# Altium PCB Ups_Design2.PcbDoc (part 1 of 2)
Units mm, origin at the board's own origin, x right, y up, seen from the top; angles counter-clockwise.
Board outline 72 x 110 mm, 2 copper layers (Top Layer, Bottom Layer); 102 components, 59 nets, 324 pads, 32 vias.
Unrouted connection lines stored in the file: 207.
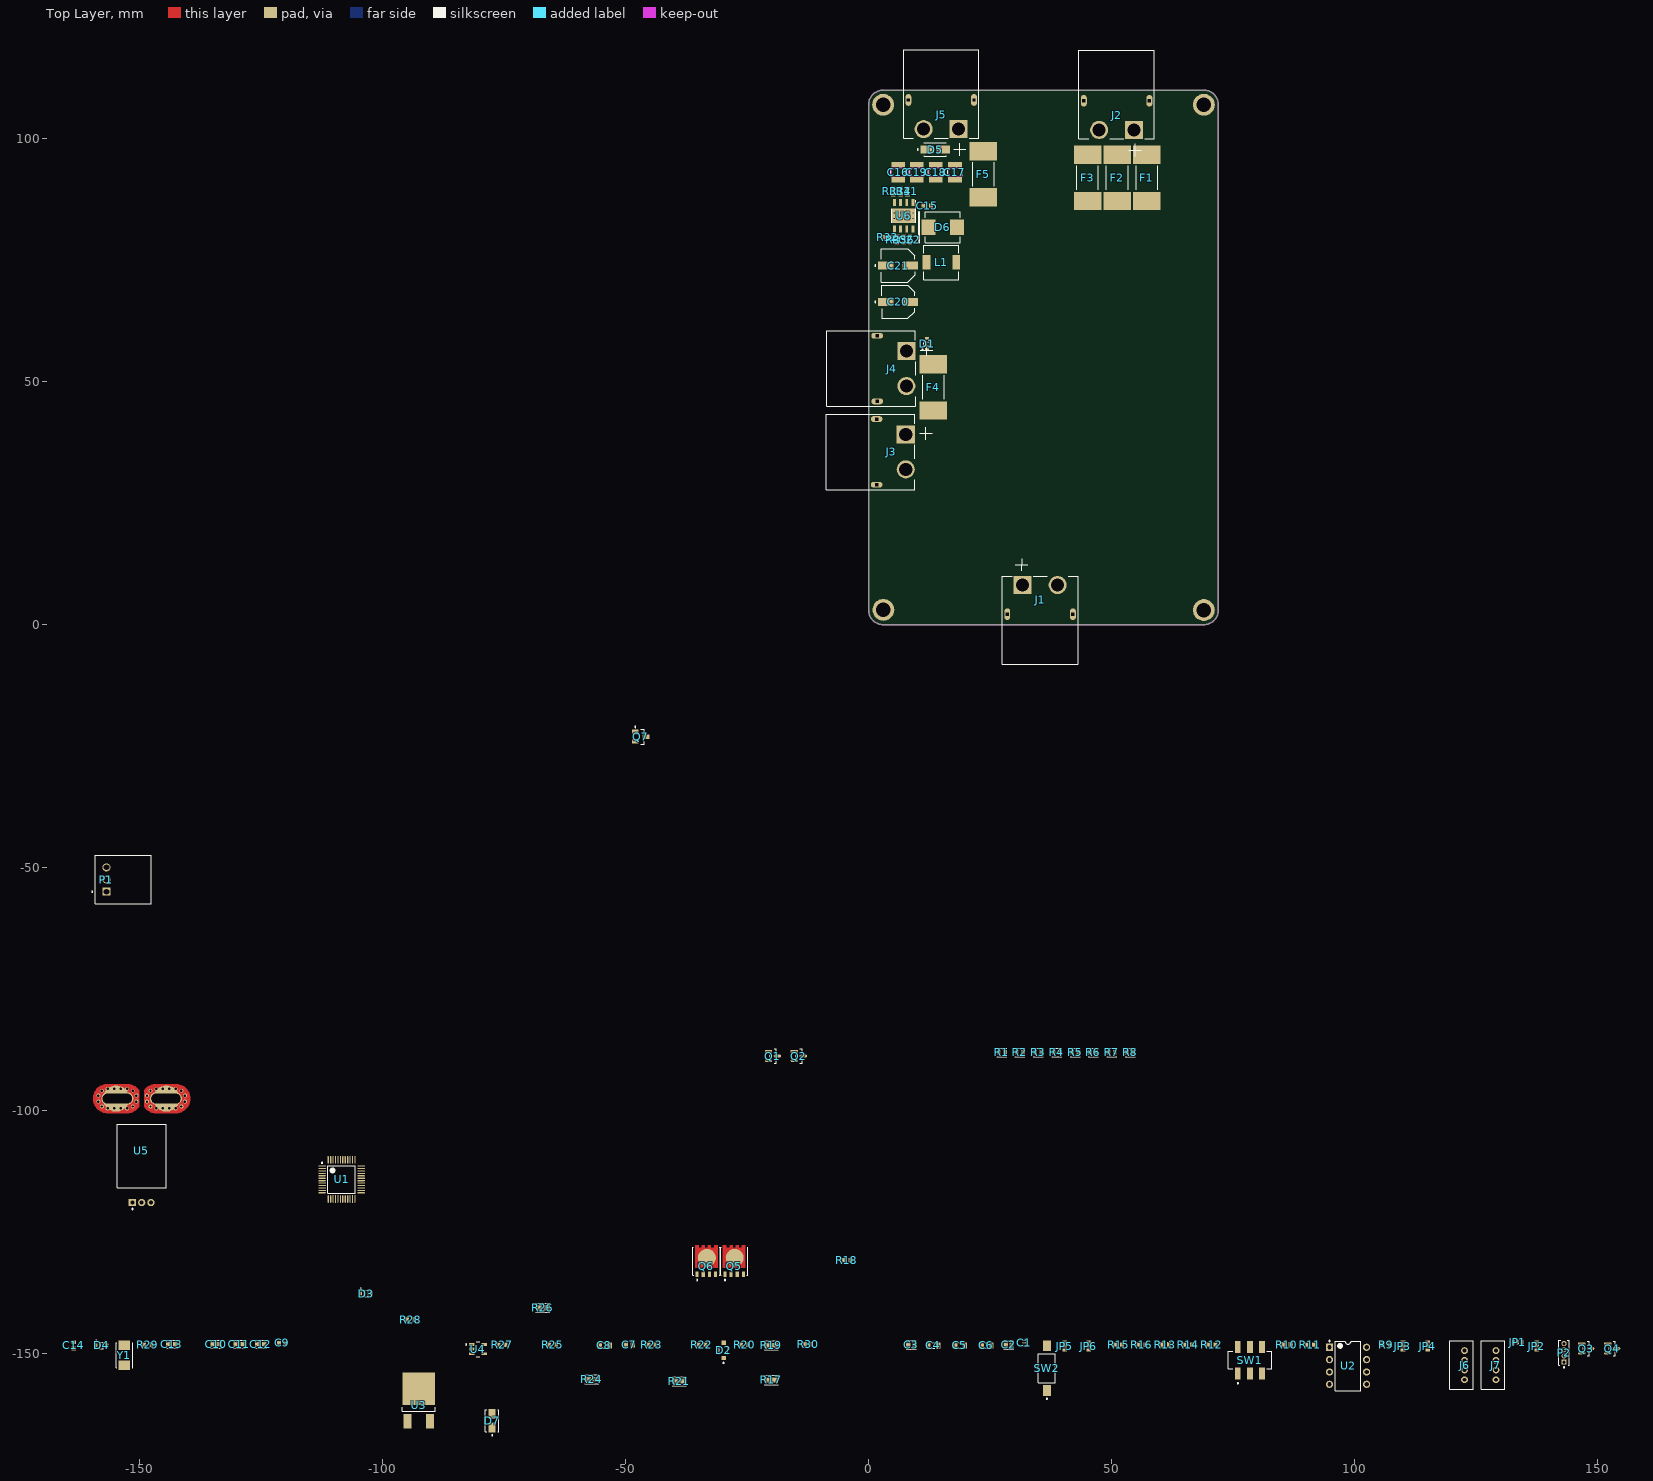
[diagram p0: Top Layer view]
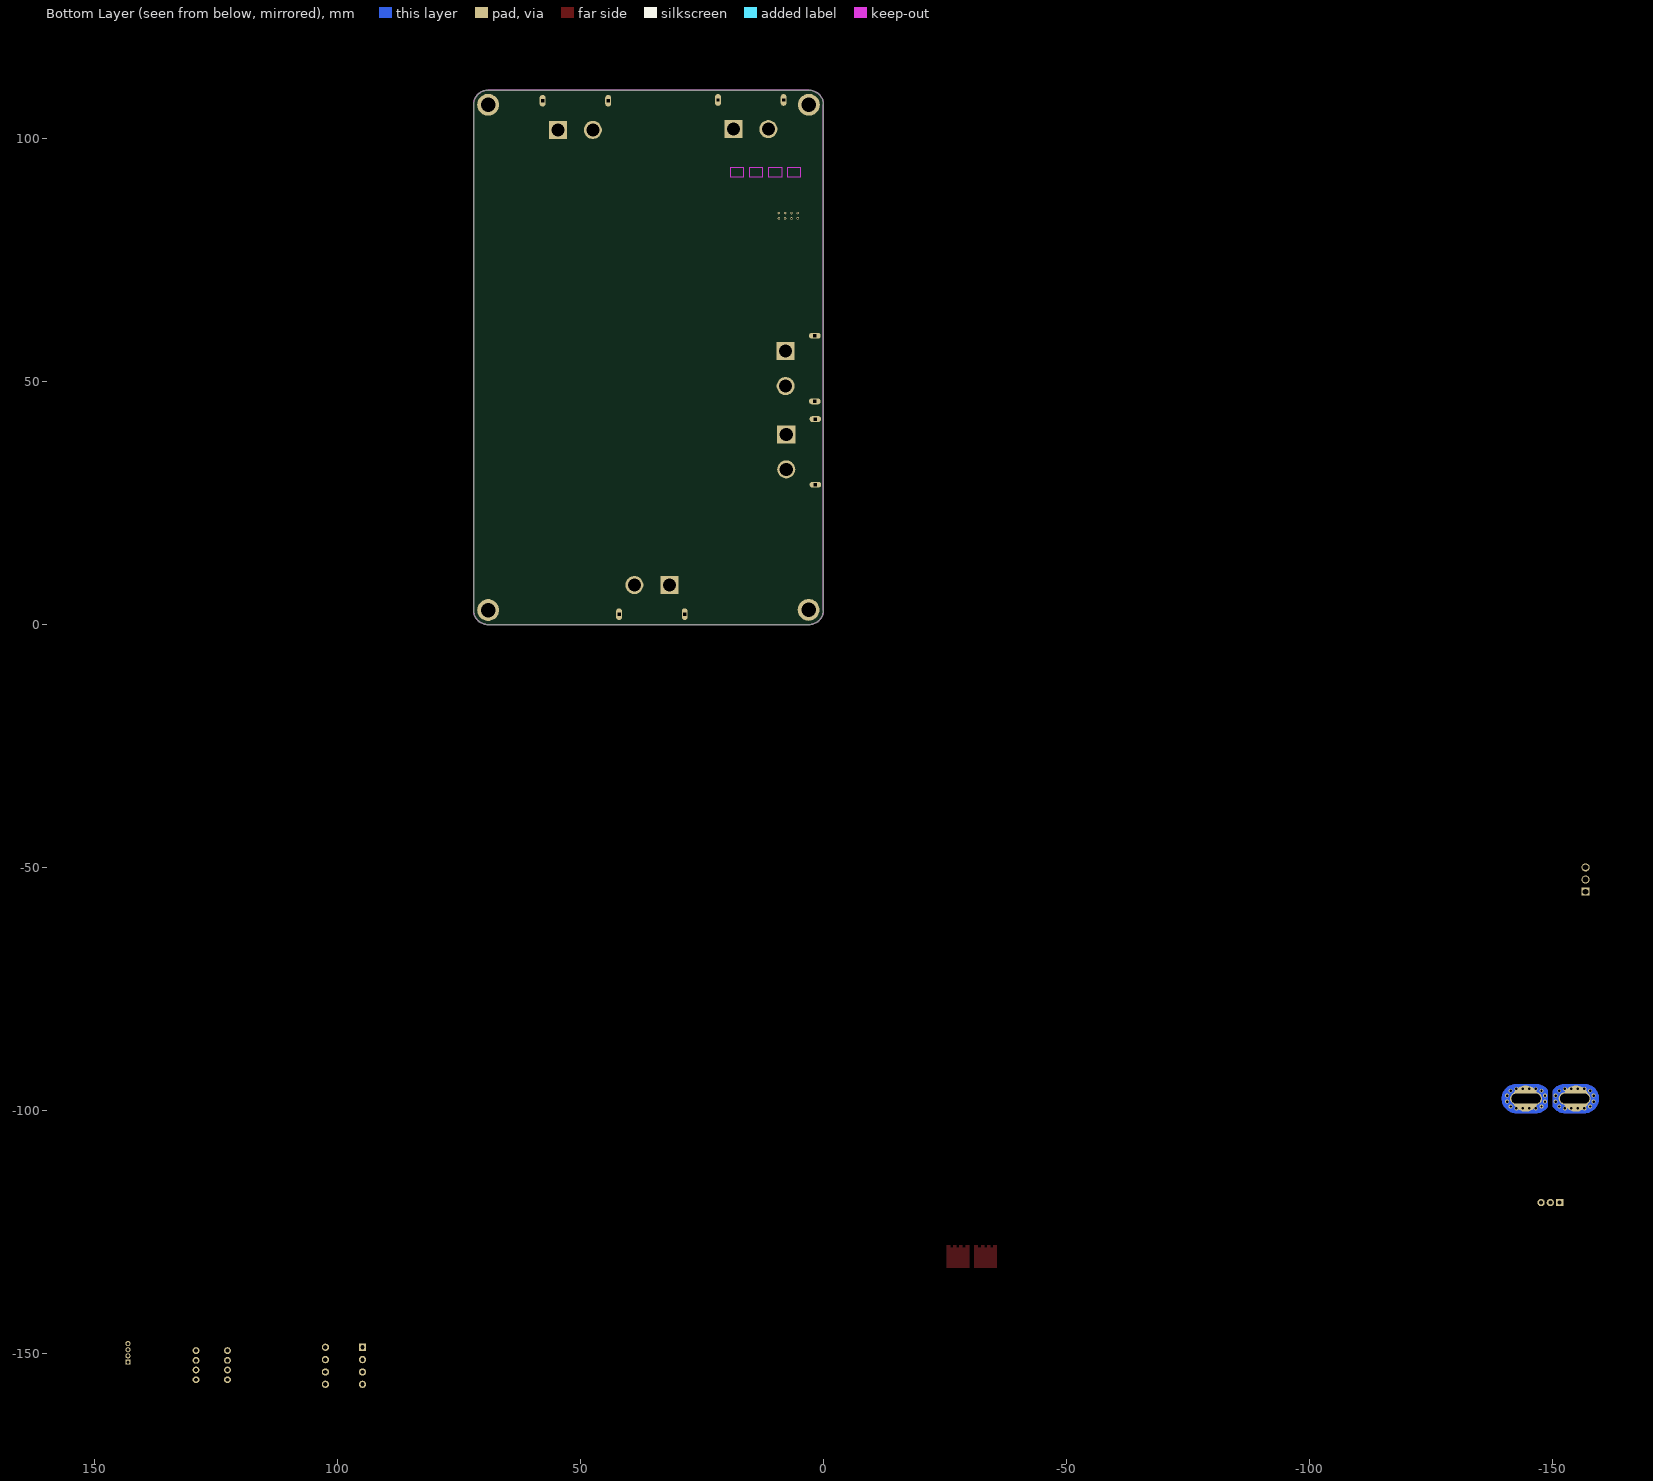
[diagram p1: Bottom Layer view, seen from below]

## Layer stack, top to bottom
Top Solder: solder mask 0.0102, Solder Resist, Dk 3.5
Top Layer: signal copper 0.0356
Dielectric 1: dielectric 0.32, FR-4, Dk 4.8
Bottom Layer: signal copper 0.0356
Bottom Solder: solder mask 0.0102, Solder Resist, Dk 3.5

## Board outline
0,3 ccw(c3,3) 3,0 69,0 ccw(c69,3) 72,3 72,107 ccw(c69,107) 69,110 3,110 ccw(c3,107) 0,107

## Design rules (kind name [scope] priority, off if disabled: settings)
BoardOutlineClearance [All] p1: gap=0.2 ignorepadtopadclearanceinfootprint=FALSE
Clearance [All] p1: gap=0.127 ignorepadtopadclearanceinfootprint=FALSE except(0.15: Fill-Fill Fill-Poly Fill-Region Poly-Poly Poly-Region Region-Region; 0.25: Arc-Hole Track-Hole SMDPad-Hole THPad-Hole Via-Hole Fill-Hole Poly-Hole Region-Hole Text-Hole)
ComponentClearance [All] p1: gap=0.127 collisioncheckmode=3 verticalgap=0.127 showdistances=TRUE
DiffPairsRouting [All] p1: maxlimit=0.254 minlimit=0.127 mostfreqgap=0.191 toplayer_minwidth=0.127 toplayer_maxwidth=25.4 toplayer_prefwidth=0.254 bottomlayer_minwidth=0.127 bottomlayer_maxwidth=25.4 bottomlayer_prefwidth=0.254 maxuncoupledlength=12.7
Height [All] p1: minheight=0 maxheight=1816.048 prefheight=12.7
HoleSize [All] p1: absolutevalues=TRUE maxlimit=6.3 minlimit=0.3 maxpercent=80.000 minpercent=20.000
HoleToHoleClearance [All] p1: gap=0.25 allowstackedmicrovias=FALSE
MinimumAnnularRing [All] p1: minimumring=0.24
MinimumSolderMaskSliver [All] p1: minsoldermaskwidth=0
PlaneClearance [All] p1: clearance=0.127
PlaneConnect PlaneConnectPowerPads [InPadClass('PowerPads')] p1: planeconnectstyle=Direct reliefexpansion=0.508 reliefentries=4 reliefconductorwidth=0.254 reliefairgap=0.254
PlaneConnect [All] p2: pad.planeconnectstyle=Relief pad.reliefexpansion=0.3 pad.reliefentries=4 pad.reliefconductorwidth=0.127 pad.reliefairgap=0.127 via.planeconnectstyle=Direct via.reliefexpansion=0.3 via.reliefentries=4 via.reliefconductorwidth=0.127 via.reliefairgap=0.127
PolygonConnect PolygonConnectPowerPads [All vs (InPadClass('PowerPads'))] p1: connectstyle=Direct reliefconductorwidth=0.254 reliefentries=4 polygonreliefangle="90 Angle" airgapwidth=0.254
PolygonConnect [All] p2: thpad.connectstyle=Relief thpad.reliefconductorwidth=0.127 thpad.reliefentries=4 thpad.polygonreliefangle="90 Angle" thpad.airgapwidth=0.127 smdpad.connectstyle=Relief smdpad.reliefconductorwidth=0.127 smdpad.reliefentries=4 smdpad.polygonreliefangle="90 Angle" smdpad.airgapwidth=0.127 via.connectstyle=Direct via.reliefconductorwidth=0.127 via.reliefentries=4 via.polygonreliefangle="90 Angle" via.airgapwidth=0.127
RoutingVias [All] p1: holewidth=0.381 width=0.762 viastyle="Through Hole" minholewidth=0.3 minwidth=0.6 maxholewidth=0.6 maxwidth=6.6
SilkToSilkClearance [All] p1: silktosilkclearance=0
SilkToSolderMaskClearance [IsPad] p1: minsilkscreentomaskgap=0.12 clearancetoexposedcopper=TRUE
SolderMaskExpansion [All] p1: expansion=0.11 istentingtop=FALSE
Width [All] p1: maxlimit=25.4 minlimit=0.18 preferedwidth=0.508 minimp=50.000000 maximp=50.000000 favimp=50.000000
20 further rules are at their usual default settings.

## Classes and differential pairs
component class Designator: C15 C16 C17 C18 C19 C20 C21 C22 D6 L1 Q7 R30 R31 R32 R33 R34 R35 R36 U6
component class Ups_Design2: C1 C2 C3 C4 C5 C6 C7 C8 C9 C10 C11 C12 C13 C14 D1 D2 D3 D4 D5 D7 F1 F2 F3 F4 F5 J1 J2 J3 J4 J5 J6 J7 JP1 JP2 JP3 JP4 JP5 JP6 P1 P2 Q1 Q2 Q3 Q4 Q5 Q6 R1 R2 R3 R4 R5 R6 R7 R8 R9 R10 R11 R12 R13 R14 R15 R16 R17 R18 R19 R20 R21 R22 R23 R24 R25 R26 R27 R28 R29 SW1 SW2 U1 U2 U3 U4 U5 Y1

## Components (designator, comment, footprint, x,y, rotation, side; value= is the part's Value field where it differs from the comment)
C1 "0.1uF" FP-GRM033-0_03-MFG 32.004,-147.828 r0 top
C2 "1 uF" FP-0603-L_1_6_0_15-W_0_8-IPC_C 28.829,-148.209 r0 top
C3 "4.7uF" FP-GRM188-0_2-IPC_C 8.763,-148.209 r0 top
C4 "100nF" FP-CGA3E-0_3-0_1-IPC_A 13.335,-148.336 r0 top
C5 "100nF" FP-CGA3E-0_3-0_1-IPC_A 18.796,-148.336 r0 top
C6 "100nF-50V" FP-CGA3E-0_3-0_1-IPC_A 24.257,-148.336 r0 top
C7 "10nF" CAPC1608X90X35ML10T15 -49.276,-148.209 r0 top
C8 "100nF" FP-CGA3E-0_3-0_1-IPC_A -54.356,-148.336 r0 top
C9 "22pF" CAPC1608X73X35LL10T15 -120.65,-147.828 r0 top
C10 "0.33 uF" FP-C1608-080-0_1-IPC_B -134.239,-148.082 r0 top
C11 "0.1 uF" FP-GCM188-0_1-IPC_B -129.54,-148.082 r0 top
C12 "0.1 uF" FP-GCM188-0_1-IPC_B -125.095,-148.082 r0 top
C13 "0.1 uF" FP-GCM188-0_1-IPC_B -143.383,-148.082 r0 top
C14 "22pF" CAPC1608X73X35LL10T15 -163.576,-148.336 r90 top
C15 "0.1 uF" FP-CC0603-DA-MFG 12.065,86.233 r180 top value="100 nF"
C16 "2.2 uF" CAP_GMC32_2.8H_CCE 6.096,93.091 r270 top
C17 "2.2 uF" CAP_GMC32_2.8H_CCE 17.78,93.091 r270 top
C18 "2.2 uF" CAP_GMC32_2.8H_CCE 13.843,93.091 r270 top
C19 "2.2 uF" CAP_GMC32_2.8H_CCE 9.906,93.091 r270 top
C20 "47 uF" FP-FPD-MFG 6.061,66.411 r0 top
C21 "47 uF" FP-FPD-MFG 6.056,73.914 r0 top
C22 "10 pF" CAPC1608X90X35LL10T15 8.509,79.248 r90 top
D1 "BAT54HT1G" ONSC-SOD-323-2-477-02_V 12.065,57.785 r90 top
D2 "18V" FP-SOD123-MFG -29.845,-149.352 r90 top
D3 "BAT54HT1G" ONSC-SOD-323-2-477-02_V -103.406,-137.668 r0 top
D4 "BAT54HT1G" ONSC-SOD-323-2-477-02_V -157.861,-148.336 r0 top
D5 "SMAJ48CA-E3/61" VISH-DO-214AC-2_M 13.716,97.79 r0 top
D6 "B560C-13-F" DIOD-B5X0C-2_M 15.269,81.788 r0 top
D7 "SMAJ18CA-E3/61" VISH-DO-214AC-2_L -77.47,-163.83 r90 top
F1 "40A" FP-0456040_DR-MFG 57.277,91.948 r90 top value=1.05mΩ
F2 "40A" FP-0456040_DR-MFG 51.181,91.948 r90 top value=1.05mΩ
F3 "40A" FP-0456040_DR-MFG 45.085,91.948 r90 top value=1.05mΩ
F4 "40A" FP-0456040_DR-MFG 13.335,48.839 r90 top value=1.05mΩ
F5 "40A" FP-0456040_DR-MFG 23.622,92.71 r90 top value=1.05mΩ
J1 "XT60PW-M" AMASS_XT60PW-M 35.306,2.159 r180 top
J2 "XT60PW-M" AMASS_XT60PW-M 51.054,107.823 r0 top
J3 "XT60PW-M" AMASS_XT60PW-M 1.651,35.56 r90 top
J4 "XT60PW-M" AMASS_XT60PW-M 1.778,52.705 r90 top
J5 "XT60PW-M" AMASS_XT60PW-M 14.942,107.981 r0 top
J6 "2mm 4Pin Connector" "New footprint 1" 122.047,-152.4 r90 top
J7 "2mm 4Pin Connector" "New footprint 1" 128.524,-152.4 r90 top
JP1 "Jumper Pad 3P" "Jumper Pad 3P-Footprint-1" 133.604,-147.701 r0 top
JP2 "Jumper Pad 3P" "Jumper Pad 3P-Footprint-1" 137.541,-148.463 r90 top
JP3 "Jumper Pad 3P" "Jumper Pad 3P-Footprint-1" 109.982,-148.463 r90 top
JP4 "Jumper Pad 3P" "Jumper Pad 3P-Footprint-1" 115.062,-148.463 r90 top
JP5 "Jumper Pad 3P" "Jumper Pad 3P-Footprint-1" 40.386,-148.463 r90 top
JP6 "Jumper Pad 3P" "Jumper Pad 3P-Footprint-1" 45.339,-148.463 r90 top
L1 "22 uH/5A" SMPI06050-220M 14.986,74.676 r180 top
P1 "S3B-XH-A(LF)(SN)" JST-S3B-XH-A(LF)(SN)_V -156.845,-52.451 r90 top
P2 "GRPB041VWVN-RC" SLIN-GRPB041VWVN-RC_V 143.129,-149.86 r90 top
Q1 "BSS138" FP-318-08-IPC_B -19.685,-88.773 r0 top
Q2 "BSS138" FP-318-08-IPC_B -14.351,-88.773 r0 top
Q3 "BSS138" FP-318-08-IPC_B 147.701,-148.971 r0 top
Q4 "BSS138" FP-318-08-IPC_B 153.035,-148.971 r0 top
Q5 "STL90N6F7" FP-8472137_SUBCON_998G-MFG -27.667,-131 r0 top
Q6 "STL90N6F7" FP-8472137_SUBCON_998G-MFG -33.382,-131 r0 top
Q7 "BSS138" FAIR-SOT23-3_V -46.906,-23.053 r0 top
R1 "10K,0603" FP-ERJ3G-IPC_C 27.432,-88.011 r0 top
R2 "10K,0603" FP-ERJ3G-IPC_C 31.115,-88.011 r0 top
R3 "10K,0603" FP-ERJ3G-IPC_C 34.925,-88.011 r0 top
R4 "10K,0603" FP-ERJ3G-IPC_C 38.735,-88.011 r0 top
R5 "10K,0603" FP-ERJ3G-IPC_C 42.545,-88.011 r0 top
R6 "10K,0603" FP-ERJ3G-IPC_C 46.228,-88.011 r0 top
R7 "10K,0603" FP-ERJ3G-IPC_C 50.038,-88.011 r0 top
R8 "10K,0603" FP-ERJ3G-IPC_C 53.848,-88.011 r0 top
R9 "4.7k" RESC1608X55X25ML10T15 106.553,-148.209 r0 top value=3.3k
R10 "100K,0603" RESC1608X100X25ML20T15 86.106,-148.209 r0 top
R11 "25k" RESC1608X55X25ML10T15 90.932,-148.209 r0 top
R12 "25k" RESC1608X55X25ML10T15 70.612,-148.209 r0 top
R13 "100K,0603" RESC1608X100X25ML20T15 61.087,-148.209 r0 top
R14 "1k" RESC1608X55X25ML10T15 65.786,-148.209 r0 top
R15 "10Kohm" RESC1608X55X25ML10T15 51.435,-148.209 r0 top
R16 "4.7k" RESC1608X55X25ML10T15 56.261,-148.209 r0 top value=3.3k
R17 "NCP18XH103F03RB" FP-NCP18-0_15-IPC_A -20.066,-155.448 r0 top
R18 "10k" RESC1608X55X25ML10T15 -4.457,-130.81 r0 top
R19 "NCP18XH103F03RB" FP-NCP18-0_15-IPC_A -20.066,-148.336 r0 top
R20 "10k" RESC1608X55X25ML10T15 -25.527,-148.209 r0 top
R21 "NCP18XH103F03RB" FP-NCP18-0_15-IPC_A -38.989,-155.702 r0 top
R22 "10k" RESC1608X55X25ML10T15 -34.29,-148.209 r0 top
R23 "10k" RESC1608X55X25ML10T15 -44.577,-148.209 r0 top
R24 "NCP18XH103F03RB" FP-NCP18-0_15-IPC_A -57.009,-155.321 r0 top
R25 "10k" RESC1608X55X25ML10T15 -65.024,-148.209 r0 top
R26 "NCP18XH103F03RB" FP-NCP18-0_15-IPC_A -67.042,-140.589 r0 top
R27 "10k" RESC1608X55X25ML10T15 -75.438,-148.209 r0 top
R28 "1k" RESC1608X55X25ML10T15 -94.246,-143.002 r0 top
R29 "2k" RESC1608X55X25ML10T15 -148.336,-148.209 r0 top
R30 "10k" RESC1609X50X30NL8T20 -12.446,-148.082 r0 top
R31 "220k" RESC1609X50X30NL8T20 8.001,89.169 r270 top
R32 "170k" RESC1609X50X30NL8T20 3.937,79.756 r180 top
R33 "240k" RESC1609X50X30NL8T20 5.08,89.169 r270 top
R34 "10k" RESC1609X50X30NL8T20 6.604,89.169 r270 top
R35 "10k" RESC1609X50X30NL8T20 5.842,79.248 r90 top
R36 "60k" RESC1609X50X30NL8T20 7.239,79.248 r90 top
SW1 "JS202011SCQN" FP-JS202011SCQN-MFG 78.486,-151.384 r0 top
SW2 "FSMSMTR" TECO-FSMSMTR_V 36.703,-153.035 r90 top
U1 "STM32F103C8T6" STM-LQFP48_L -108.458,-114.173 r0 top
U2 "LM741CN/NOPB" P0008A 98.679,-152.527 r0 top
U3 "L78M05ABDT-TR" FP-L78M05ABDT-TR-MFG -92.583,-158.75 r0 top
U4 "TLV73333PDBVR" FP-DBV0005A-MFG -80.391,-149.098 r0 top
U5 "ACS770KCB-150B-PFF-T" FP-CB-5-PFF-MFG -149.606,-109.347 r0 top
U6 "TPS54560DDAR" DDA0008E_N 7.224,84.159 r270 top
Y1 "ABM3-8.000MHZ-D2Y-T" FP-ABM3-MFG -153.162,-150.368 r90 top

## Footprints (in the part's own frame and the unit in brackets; to place one, negate y for a bottom-side part, rotate by r counter-clockwise, add the part's x,y. Pads: shape width x height; smd on the part's side, far side on the other; paste and mask are expansions set on the pad)
AMASS_XT60PW-M [mm]
  rect 3.716x3.716 / inner round 3.716 / far side rect 3.716x3.716 hole 2.7: 1(3.6,-6)
  round 3.716 hole 2.7: 2(-3.6,-6)
  oval 1.2x2.4 hole 0.6 square: S1(6.75,0) S2(-6.75,0)
  silkscreen extent -7.75,-11.43 7.75,10.35, body extent -7.75,-7.85 7.75,10.35, height 8.4
CAP_GMC32_2.8H_CCE [mil]
  rect 44x110 smd paste+0 mask+0: 1(-61,0) 2(61,0)
  Top Layer keep-out region: -37,-53 -37,53 37,53 37,-53
  Keep-Out Layer region: -37,-55 -37,55 37,55 37,-55
  silkscreen extent -27,-60 27,60, body extent -69,-55 69,55, height 110
CAPC1608X73X35LL10T15 [mm] "Chip Capacitor, 2-Leads, Body 1.60x0.81mm, IPC High Density"
  rect 0.8x0.85 smd: 1(-0.65,0) 2(0.65,0)
  body extent -0.85,-0.46 0.85,0.46, height 0.73
CAPC1608X90X35LL10T15 [mm] "Chip Capacitor, 2-Leads, Body 1.60x0.80mm, IPC High Density"
  rect 0.75x0.85 smd: 1(-0.625,0) 2(0.625,0)
  body extent -0.85,-0.45 0.85,0.45, height 0.9
CAPC1608X90X35ML10T15 [mm] "Chip Capacitor, 2-Leads, Body 1.7x0.9mm, IPC Low Density"
  rect 0.95x1.05 smd: 1(-0.725,0) 2(0.725,0)
  body extent -0.85,-0.45 0.85,0.45, height 0.9
DDA0008E_N [mm]
  rect 1.45x0.6 smd paste+0 mask+0: 1(-2.725,1.905) 2(-2.725,0.635) 3(-2.725,-0.635) 4(-2.725,-1.905) 5(2.725,-1.905) 6(2.725,-0.635) 7(2.725,0.635) 8(2.725,1.905)
  rect 2.95x4.9 smd paste-2.437 mask-2.438: 9(0,0)
  round 0.5 / inner round 1.524 / far side round 0.5 hole 0.203 paste-0.25 mask-0.241: V(-0.55,1.95) V(-0.55,0.65) V(-0.55,-0.65) V(-0.55,-1.95) V(0.55,-0.65) V(0.55,-1.95) V(0.55,1.95) V(0.55,0.65)
  silkscreen extent -3.22,-2.5 1.4,2.5
DIOD-B5X0C-2_M [mm] "Molded Diode, 2-Leads, Body 7.11x6.22mm, IPC Low Density"
  rect 2.85x3.2 smd: 1(-2.95,0) 2(2.95,0)
  silkscreen extent -4.87,-3.15 3.6,3.15, body extent -3.56,-3.11 3.55,3.11, height 2.63
FAIR-SOT23-3_V [mm] "SOT23, 3-Leads, Body 3.12x1.5mm, Pitch 0.95mm"
  rect 1.4x1 smd: 1(-1.1,0.95) 2(-1.1,-0.95) 3(1.1,0)
  silkscreen extent -1.22,-1.55 0.75,2.12, body extent -1.35,-1.56 1.35,1.56, height 1.2
FP-318-08-IPC_B [mm]
  rect 1.524x0.578 smd paste+0 mask+0: 1(-0.91,0.95)
  rrect100% 1.524x0.578 smd paste+0 mask+0: 2(-0.91,-0.95) 3(0.91,0)
  silkscreen extent -0.65,-1.45 0.65,1.45, body extent -1.92,-1.7 1.92,1.7, height 0.25
FP-0603-L_1_6_0_15-W_0_8-IPC_C [mm]
  rect 0.858x0.862 smd paste+0 mask+0: 1(-0.602,0) 2(0.602,0)
  silkscreen extent -1.03,-0.87 1.03,0.87, body extent -1.13,-0.58 1.13,0.58, height 0.25
FP-0456040_DR-MFG [mm]
  rect 3.79x5.65 smd paste+0 mask+0: 1(-4.755,0) 2(4.755,0)
  silkscreen extent -2.48,-2.22 2.48,2.22, body extent -6.75,-2.93 6.75,2.93, height 0.25
FP-8472137_SUBCON_998G-MFG [mm]
  rect 0.65x1.15 smd paste+0 mask+0: 1(-1.905,-2.725) 2(-0.635,-2.725) 3(0.635,-2.725) 4(1.905,-2.725)
  round 3.687 smd paste+0 mask+0: 5-6-7-8(0.108,0.698)
  Top Layer region: -2.3,-1.35 2.3,-1.35 2.3,3.3 1.575,3.3 1.575,2.75 0.95,2.75 0.95,3.3 0.312,3.3 0.312,2.75 -0.313,2.75 -0.313,3.3 -0.95,3.3 -0.95,2.75 -1.575,2.75 -1.575,3.3 -2.3,3.3
  silkscreen extent -2.8,-4 2.8,2.9, body extent -2.7,-3.4 2.7,3.4, height 0.25
FP-ABM3-MFG [mm]
  rect 1.9x2.4 smd paste+0 mask+0: 1(-2.05,0) 2(2.05,0)
  silkscreen extent -2.6,-1.7 2.6,1.7, body extent -3.1,-1.8 3.1,1.8, height 0.25
FP-C1608-080-0_1-IPC_B [mm]
  rect 1.131x0.912 smd paste+0 mask+0: 1(-0.641,0) 2(0.641,0)
  silkscreen extent -1.21,-0.86 1.21,0.86, body extent -1.46,-0.71 1.46,0.71, height 0.25
FP-CB-5-PFF-MFG [mm]
  rect 1.5x1.5 hole 0.8 paste-1000 mask+0: 1(-1.91,-9.59)
  round 1.5 hole 0.8 paste-1000 mask+0: 2(0,-9.591) 3(1.91,-9.59)
  rrect100% 6.6x2.6 hole 2 slot 6 at 0 deg paste-1000 mask+0: 4(5,11.809) 5(-5,11.809)
  round 5.4 smd paste-1000 mask+0: 4(5.099,11.809) 5(-5.25,11.809)
  round 5.4 smd far side paste-1000 mask+0: 4(5.099,11.809) 5(-5.25,11.809)
  Top Layer region: 0.5,13.468 1.581,14.453 3,14.809 3,14.809 7,14.81 8.302,14.512 9.345,13.68 9.925,12.477 9.925,11.142 9.345,9.939 8.302,9.107 7,8.809 7,8.809 3,8.809 1.581,9.166 0.5,10.151 0.5,10.151
  Top Layer region: -0.5,10.151 -1.581,9.166 -3,8.81 -3,8.81 -7,8.809 -8.302,9.107 -9.345,9.939 -9.925,11.142 -9.925,12.477 -9.345,13.68 -8.302,14.512 -7,14.809 -7,14.81 -3,14.81 -1.581,14.453 -0.5,13.468 -0.5,13.468
  Bottom Layer region: 0.5,13.468 1.581,14.453 3,14.809 3,14.809 7,14.81 8.302,14.512 9.345,13.68 9.925,12.477 9.925,11.142 9.345,9.939 8.302,9.107 7,8.809 7,8.809 3,8.809 1.581,9.166 0.5,10.151 0.5,10.151
  Bottom Layer region: -0.5,10.151 -1.581,9.166 -3,8.81 -3,8.81 -7,8.809 -8.302,9.107 -9.345,9.939 -9.925,11.142 -9.925,12.477 -9.345,13.68 -8.302,14.512 -7,14.809 -7,14.81 -3,14.81 -1.581,14.453 -0.5,13.468 -0.5,13.468
  silkscreen extent -5.05,-11.04 5.05,6.55, body extent -10.1,-10.44 10.1,14.91, height 0.25
FP-CC0603-DA-MFG [mm]
  rect 0.8x0.9 smd paste+0 mask+0: 1(-0.75,0) 2(0.75,0)
  body extent -1.35,-0.75 1.35,0.75, height 0.25
FP-CGA3E-0_3-0_1-IPC_A [mm]
  rect 0.956x1.206 smd paste+0 mask+0: 1(-1.025,0) 2(1.025,0)
  silkscreen extent -0.25,-0.6 0.25,0.6, body extent -2,-1.1 2,1.1, height 0.25
FP-DBV0005A-MFG [mm]
  rrect17% 1.1x0.6 smd paste+0 mask+0: 1(-1.3,0.95) 2(-1.3,0) 3(-1.3,-0.95) 4(1.3,-0.95) 5(1.3,0.95)
  silkscreen extent -2.55,-1.53 0.87,1.52, body extent -1.95,-1.78 1.95,1.78, height 0.25
FP-ERJ3G-IPC_C [mm]
  rect 0.757x0.862 smd paste+0 mask+0: 1(-0.651,0) 2(0.651,0)
  silkscreen extent -1.03,-0.87 1.03,0.87, body extent -1.13,-0.58 1.13,0.58, height 0.25
FP-FPD-MFG [mm]
  rect 3.2x1.6 smd paste+0 mask+0: 1(-2.5,0) 2(2.5,0)
  silkscreen extent -4.8,-3.4 3.4,3.4, body extent -4.35,-3.65 4.35,3.65, height 0.25
FP-GCM188-0_1-IPC_B [mm]
  rect 0.959x0.912 smd paste+0 mask+0: 1(-0.727,0) 2(0.727,0)
  silkscreen extent -1.21,-0.86 1.21,0.86, body extent -1.46,-0.71 1.46,0.71, height 0.25
FP-GRM033-0_03-MFG [mm]
  rect 0.25x0.3 smd paste+0 mask+0: 1(-0.238,0) 2(0.238,0)
  silkscreen extent -0.32,-0.54 0.32,0.54, body extent -0.46,-0.27 0.46,0.27, height 0.25
FP-GRM188-0_2-IPC_C [mm]
  rect 0.905x0.906 smd paste+0 mask+0: 1(-0.601,0) 2(0.601,0)
  silkscreen extent -1.05,-0.9 1.05,0.9, body extent -1.15,-0.6 1.15,0.6, height 0.25
FP-JS202011SCQN-MFG [mm]
  rect 1.2x2.5 smd paste+0 mask+0: 1(-2.5,-2.75) 2(0,-2.75) 3(2.5,-2.75) 4(-2.5,2.75) 5(0,2.75) 6(2.5,2.75)
  silkscreen extent -4.5,-4.85 4.5,1.8, body extent -4.6,-4.1 4.6,4.1, height 0.25
FP-L78M05ABDT-TR-MFG [mm]
  rect 1.6x3 smd paste+0 mask+0: 1(-2.3,-5.193) 3(2.3,-5.193)
  rect 6.7x6.7 smd paste+0 mask+0: 4(0,1.458)
  silkscreen extent -3.36,-3.11 3.36,-2.27, body extent -3.46,-6.79 3.46,4.91, height 0.25
FP-NCP18-0_15-IPC_A [mm]
  rect 1.306x1.058 smd paste+0 mask+0: 1(-0.776,0) 2(0.776,0)
  silkscreen extent -1.43,-0.93 1.43,0.93, body extent -1.93,-1.03 1.93,1.03, height 0.25
FP-SOD123-MFG [mm]
  rect 0.9x0.95 smd paste+0 mask+0: 1(-1.575,0) 2(1.575,0)
  silkscreen extent -2.7,-0.85 0.75,0.85, body extent -2.12,-0.95 2.12,0.95, height 0.25
JST-S3B-XH-A(LF)(SN)_V [mm] "Header, 3-Leads, Body 9.9x11.5mm, Pitch 2.5mm"
  rect 1.65x1.65 hole 1.15: 1(-2.5,0)
  round 1.65 hole 1.15: 2(0,0) 3(2.5,0)
  silkscreen extent -4.95,-9.2 4.95,3.07, body extent -4.95,-9.2 4.95,2.3, height 6.15
"Jumper Pad 3P-Footprint-1" [mm]
  rect 0.6x0.95 smd mask+0.102: 1(-0.85,0) 2(0,0) 3(0.85,0)
"New footprint 1" [mm]
  round 1.4 hole 0.8: 1(-3,-0.6) 2(-1,-0.6) 3(1,-0.6) 4(3,-0.6)
  silkscreen extent -5,-2.4 5,2.4, body extent -5.25,-2.6 5.25,2.6, height 0.25
ONSC-SOD-323-2-477-02_V [mm] "SOD, 2-Leads, Body 1.7x1.25mm"
  rect 0.63x0.83 smd: 1(-1.115,0) 2(1.115,0)
  silkscreen extent -1.24,-0.67 0.4,1.09, body extent -0.85,-0.63 0.85,0.63, height 1.06
P0008A [mm] "DIP, 8-Leads, Body 10.15x6.6mm, Pitch 2.54mm"
  rect 1.5x1.5 hole 0.9: 1(-3.81,3.81)
  round 1.5 hole 0.9: 2(-3.81,1.27) 3(-3.81,-1.27) 4(-3.81,-3.81) 5(3.81,-3.81) 6(3.81,-1.27) 7(3.81,1.27) 8(3.81,3.81)
  silkscreen extent -3.93,-5.1 2.65,5.23, body extent -3.95,-5.07 3.95,5.07, height 5.08
RESC1608X55X25ML10T15 [mm] "Chip Resistor, 2-Leads, Body 1.70x0.90mm, IPC Low Density"
  rect 0.8x1 smd: 1(-0.75,0) 2(0.75,0)
  body extent -0.85,-0.45 0.85,0.45, height 0.55
RESC1608X100X25ML20T15 [mm] "Chip Resistor, 2-Leads, Body 1.60x0.80mm, IPC Low Density"
  rect 0.9x1.1 smd: 1(-0.75,0) 2(0.75,0)
  body extent -0.9,-0.5 0.9,0.5, height 1
RESC1609X50X30NL8T20 [mm] "Chip Resistor, 2-Leads, Body 1.65x0.95mm, IPC Medium Density"
  rect 0.8x0.95 smd: 1(-0.65,0) 2(0.65,0)
  body extent -0.82,-0.48 0.82,0.48, height 0.5
SLIN-GRPB041VWVN-RC_V [mm] "Header, 4-Leads, Body 5.08x2.14mm, Pitch 1.27mm"
  rect 1.05x1.05 hole 0.7: 1(-1.905,0)
  round 1.05 hole 0.7: 2(-0.635,0) 3(0.635,0) 4(1.905,0)
  silkscreen extent -3.1,-1.07 2.54,1.07, body extent -2.54,-1.07 2.54,1.07, height 4
SMPI06050-220M [mm] "INDUCTOR POWER 22UH 7.7X6.6MM SMD"
  rect 1.6x3 smd: 1(-3.05,0.127) 2(3.05,0.127)
  silkscreen extent -3.56,-3.43 3.68,3.68
STM-LQFP48_L [mm] "QFP, 48-Leads, Body 7x7mm, Pitch 0.5mm, IPC High Density"
  oval 1.55x0.25 smd: 1(-4.025,2.75) 2(-4.025,2.25) 3(-4.025,1.75) 4(-4.025,1.25) 5(-4.025,0.75) 6(-4.025,0.25) 7(-4.025,-0.25) 8(-4.025,-0.75) 9(-4.025,-1.25) 10(-4.025,-1.75) 11(-4.025,-2.25) 12(-4.025,-2.75) 25(4.025,-2.75) 26(4.025,-2.25) 27(4.025,-1.75) 28(4.025,-1.25) 29(4.025,-0.75) 30(4.025,-0.25) 31(4.025,0.25) 32(4.025,0.75) 33(4.025,1.25) 34(4.025,1.75) 35(4.025,2.25) 36(4.025,2.75)
  oval 0.25x1.55 smd: 13(-2.75,-4.025) 14(-2.25,-4.025) 15(-1.75,-4.025) 16(-1.25,-4.025) 17(-0.75,-4.025) 18(-0.25,-4.025) 19(0.25,-4.025) 20(0.75,-4.025) 21(1.25,-4.025) 22(1.75,-4.025) 23(2.25,-4.025) 24(2.75,-4.025) 37(2.75,4.025) 38(2.25,4.025) 39(1.75,4.025) 40(1.25,4.025) 41(0.75,4.025) 42(0.25,4.025) 43(-0.25,4.025) 44(-0.75,4.025) 45(-1.25,4.025) 46(-1.75,4.025) 47(-2.25,4.025) 48(-2.75,4.025)
  silkscreen extent -4.15,-2.85 2.85,3.55, body extent -3.5,-3.5 3.5,3.5, height 1.6
TECO-FSMSMTR_V [mm] "SMD, 2-Leads, Body 6x3.5mm, Pitch 9.19mm"
  rect 2.2x1.6 smd: 1(-4.595,0)
  rect 2.18x1.6 smd: 2(4.595,0)
  silkscreen extent -6.37,-1.75 3,1.75, body extent -4.98,-1.75 4.98,1.75, height 4.4
VISH-DO-214AC-2_L [mm] "DO-214AC, 2-Leads, Body 4.5x2.79mm, IPC High Density"
  rect 2.05x1.45 smd: 1(-1.425,0) 2(1.425,0)
  silkscreen extent -3.12,-1.4 2.25,1.4, body extent -2.25,-1.4 2.25,1.4, height 2.29
VISH-DO-214AC-2_M [mm] "DO-214AC, 2-Leads, Body 4.5x2.79mm, IPC Low Density"
  rect 2.8x1.7 smd: 1(-1.625,0) 2(1.625,0)
  silkscreen extent -3.7,-1.4 2.25,1.4, body extent -2.25,-1.39 2.25,1.4, height 2.29

## Part data
C1: library part CMP-06035-000062-2, "Chip Multilayer Ceramic Capacitors for General Purpose, 0201, 0.10uF, X5R, 15%, 10%, 6.3V", Capacitance=100nF, Case Code (Imperial)=0201, Case Code (Metric)=0603, Dielectric=X5R, Max Operating Temperature=85°C, Min Operating Temperature=-55°C, Package Quantity=1, Tolerance=10%, Voltage=6.3V, Case/Package=0201, Depth=0.3mm, Height=0.3mm, Lead Free="Lead Free", Length=0.6mm, Material=Ceramic, Mount="Surface Mount", Packaging="Tape and Reel", Radiation Hardening=No, REACH SVHC="No SVHC", Termination=SMD/SMT, Thickness=0.013inch, Voltage Rating=6.3V, Voltage Rating (DC)=6.3V, Weight=6E-06oz, Width=0.012inch
C2: library part CMP-2000-07531-4, "Ceramic Capacitor General Use 1uF ±10% 50V X7R 0603", Capacitance=1uF, Case Code (Imperial)=0603, Case Code (Metric)=1608, Dielectric=X7R, Max Operating Temperature=125°C, Min Operating Temperature=-55°C, Package Quantity=1, Tolerance=10%, Voltage Rating=50V, Case/Package=0603, Construction=Flat, Depth=0.8mm, Halogen Free="Halogen Free", Height=0.8mm, Length=1.6mm, Mount="Surface Mount", Packaging="Tape and Reel", Radiation Hardening=No, RoHS Compliant=Yes, Series=M, Termination=SMD/SMT, Thickness=0.037inch, Voltage Rating (DC)=50V, Width=0.031inch
C3: library part CMP-2006-02545-2, "Chip Multilayer Ceramic Capacitors for General Purpose, 0603, 4.7uF, X5R, 15%, 10%, 35V", Case Code (Imperial)=0603, Case Code (Metric)=1608, Dielectric=X5R, Max Operating Temperature=85°C, Min Operating Temperature=-55°C, Package Quantity=4000, Resistor Type=Ceramic, Tolerance=10%, Voltage=35V, Capacitance=4.7uF, Case/Package=0603, Depth=0.8mm, Height=0.8mm, Lead Free="Lead Free", Length=1.6mm, Material=Ceramic, Mount="Surface Mount", Packaging="Tape and Reel", REACH SVHC="No SVHC", Termination=SMD/SMT, Thickness=0.031inch, Voltage Rating=35V, Voltage Rating (DC)=35V, Weight=0.000222oz, Width=0.8mm
C4 C5 C8: library part CMP-2000-07546-2, "Cap Ceramic 100nF 50V X7R 10% Pad SMD 0603 +125°C Automotive T/R", Case Code (Imperial)=0603, Case Code (Metric)=1608, Dielectric=X7R, Max Operating Temperature=125°C, Min Operating Temperature=-55°C, Package Quantity=1, Ratings=AEC-Q200, Tolerance=10%, Voltage=50V, Capacitance=100nF, Case/Package=0603, Composition=Ceramic, Depth=0.8mm, Height=0.8mm, Lead Free="Lead Free", Length=1.6mm, Mount="Surface Mount", Packaging="Tape and Reel", Radiation Hardening=No, REACH SVHC="No SVHC", Termination=SMD/SMT, Thickness=0.035inch, Voltage Rating=50V, Voltage Rating (DC)=50V, Weight=7.1E-05oz, Width=0.8mm
C6: library part CMP-2000-07546-2, "Cap Ceramic 100nF 50V X7R 10% Pad SMD 0603 +125°C Automotive T/R", Capacitance=100nF, Case Code (Imperial)=0603, Case Code (Metric)=1608, Dielectric=X7R, Max Operating Temperature=125°C, Min Operating Temperature=-55°C, Package Quantity=1, Ratings=AEC-Q200, Tolerance=10%, Voltage=50V, Case/Package=0603, Composition=Ceramic, Depth=0.8mm, Height=0.8mm, Lead Free="Lead Free", Length=1.6mm, Mount="Surface Mount", Packaging="Tape and Reel", Radiation Hardening=No, REACH SVHC="No SVHC", Termination=SMD/SMT, Thickness=0.035inch, Voltage Rating=50V, Voltage Rating (DC)=50V, Weight=7.1E-05oz, Width=0.8mm
C7: library part CMP-2100-03642-1, "Chip Capacitor, 10 nF, +/- 10%, 50 V, -55 to 125 degC, 0603 (1608 Metric), RoHS, Tape and Reel", Case Code (Imperial)=0603, Case Code (Metric)=1608, Dielectric=X7R, Dielectric Material=Ceramic, Insulation Resistance=10GR, Manufacturer=Murata, Max Operating Temperature=125degC, Min Operating Temperature=-55degC, Package Description="2-Pin Surface Mount Device, Body 1.6 x 0.8 mm", Package Quantity=1, Tolerance=10%, Voltage=50V, Capacitance=10nF, Case/Package=0603, Datasheet URL=http://search.murata.co.jp/Ceramy/image/img/A01X/G101/ENG/GRM188R71H103KA01-01.pdf, Datasheet Version=42401.0, Depth=0.8mm, Height=0.8mm, Lead Free=LeadFree, Length=1.6mm, Manufacturer URL=http://www.murata.com/, Material=Ceramic, Mount=SurfaceMount, Number of Pins=2, Package Reference=0603, Packaging=TapeandReel, REACH SVHC=Unknown, RoHSCompliant=True, Termination=SMD/SMT, Thickness=0.035inch, Voltage Rating=50V, Voltage Rating (DC)=50V, Width=0.031inch
C9 C14: library part CMP-2006-04604-1, Manufacturer="AVX Interconnect / Elco", Part Number=06033J220GBSTR
C10: library part CMP-2000-07551-2, "Multilayer Ceramic Capacitors 330nF ±10% 50V X7R SMD 0603", Capacitance=330nF, Case Code (Imperial)=0603, Case Code (Metric)=1608, Dielectric=X7R, Dielectric Material=Ceramic, Max Operating Temperature=125°C, Min Operating Temperature=-55°C, Package Quantity=1, Tolerance=10%, Voltage=50V, Case/Package=0603, Construction=Flat, Depth=0.8mm, Height=0.8mm, Lead Free="Lead Free", Length=1.6mm, Mount="Surface Mount", Packaging="Tape and Reel", REACH SVHC="No SVHC", Resistor Type=Ceramic, RoHS Compliant=Yes, Series=C, Termination=SMD/SMT, Thickness=0.037inch, Voltage Rating=50V, Voltage Rating (DC)=50V, Weight=7.1E-05oz, Width=0.031inch
C11 C12 C13: library part CMP-2006-02353-3, "Ceramic Capacitor for Automotive 100nF  ±10% 50VDC X8L 0603 Paper T/R", Capacitance=100nF, Case Code (Imperial)=0603, Case Code (Metric)=1608, Dielectric=X8L, Max Operating Temperature=150°C, Min Operating Temperature=-55°C, Package Quantity=4000, Ratings=AEC-Q200, Tolerance=10%, Voltage=50V, Case/Package=0603, Depth=0.8mm, Height=0.8mm, Lead Free="Lead Free", Length=1.6mm, Mount="Surface Mount", Packaging="Tape and Reel", Radiation Hardening=No, Termination=SMD/SMT, Thickness=0.035inch, Voltage Rating=50V, Voltage Rating (DC)=50V, Width=0.5mm
C15: library part CMP-2000-05002-2, "CAP CER 0.1UF 16V X7R 0603", Capacitance="100 nF", Manufacturer=YAGEO, Manufacturer Part Number=CC0603KRX7R7BB104, Package=CC0603-DA, Temperature="-55°C to +125°C", Temperature Characteristic=X7R, Temperature Coefficient=15%, Temperature Range High=+125°C, Temperature Range Low=-55°C, Tolerance=0.1, Voltage="16 V", Automotive=No, Category=Cap, ComponentLink2Description=Datasheet, ComponentLink2URL=http://www.yageo.com/documents/recent/UPY-GPHC_X7R_6.3V-to-50V_18.pdf, Device Class L1="Passive Components", Device Class L2=Capacitors, Device Class L3="Ceramic Capacitors", Digikey Description="CAP CER 0.1UF 16V X7R 0603", Footprint Url=http://www.yageo.com/exep/pages/download/literatures/UPY-C_GEN_24.pdf, Height=0.9mm, Lead Free=Yes, Material=Ceramic, Mouser Description="Multilayer Ceramic Capacitor, CC Series, 0.1 - F, - 10%, X7R, 16 V, 0603 [1608 Metric]", Octopart=https://octopart.com/cc0603krx7r7bb104-yageo-192941, RoHS=TRUE, Voltage Rating="16 V"
C16 C17 C18 C19: library part GMC32X7R225K100NT, "GMC32X7R225K100NT-CAP CER 2.2UF 100V X7R 1210", Mfr_Name="Cal-Chip Electronics", Copyright="Copyright (C) 2023 Ultra Librarian. All rights reserved.", Manufacturer_Part_Number=GMC32X7R225K100NT, RefDes=RefDes, Type=DEV
C20 C21: library part CMP-2000-06216-2, "CAP ALUM 47UF 20% 35V SMD", Capacitance=47uF, Case/Package=Radial, ESR (Equivalent Series Resistance)=260mR, Leakage Current=3uA, Max Operating Temperature=105°C, Min Operating Temperature=-55°C, Package Quantity=1, Ripple Current=300mA, Tolerance=20%, Voltage=35V, Construction=Cylindrical, Contact Plating=Tin, Diameter=6.3mm, Dissipation Factor=0.12%, Height=5.8mm, Height - Seated (Max)=0.228inch, Lead Free="Lead Free", Lead Pitch=1.8mm, Length=5.8mm, Life (Hours)=2000Hour, Material=Aluminium, Mount="Surface Mount", Number of Pins=2, Packaging="Tape and Reel", Radiation Hardening=No, REACH SVHC="No SVHC", Ripple Current (AC)=300mA, RoHS Compliant=Yes, Series=FP, Termination=SMD/SMT, Voltage Rating=35V, Voltage Rating (DC)=35V
C22: library part CMP-2006-02592-1, "Multilayer Ceramic Capacitor, 10 pF, 50 V, ± 5%, C0G (NP0), 0603 [1608 Metric]", Manufacturer=Murata, Part Number=GRM1885C1H100JA01D
D1 D3 D4: library part CMP-1055-00462-1, "Schottky Barrier Diode, 2-Pin SOD-323, Pb-Free, Tape and Reel", Manufacturer="On Semiconductor", ComponentLink1Description="Manufacturer URL", ComponentLink1URL=http://www.onsemi.com/, ComponentLink2Description=Datasheet, ComponentLink2URL=http://www.onsemi.cn/pub_link/Collateral/BAT54HT1-D.PDF, ComponentLink3Description="Package Specification", ComponentLink3URL=http://www.onsemi.com/pub_link/Collateral/477-02.PDF.1, Configuration=Single, DatasheetVersion="Rev. 6", IFSM Max (A)=0.6, Mounting Technology="Surface Mount", PackageDescription="2-Pin SOD, Body 1.7 x 1.25 mm", PackageReference=SOD-323-2-477-02, PackageVersion="Rev. H, 03/2007", Packing="Tape and Reel", PartNumber=BAT54HT1G, RoHS=TRUE, trr Max (ns)=5
D2: library part CMP-12792-000007-1, "DIODE ZENER 18V 500MW SOD123", Forward Current=10mA, Manufacturer="Diodes Inc.", Manufacturer Part Number=BZT52C18-7-F, Max Junction Temp=+150°C, Max Reverse Leakage Current=0.1uA, Max Zener Voltage=19.1V, Package=SOD123, Power Dissipation=370mW, Reverse Voltage=12.6V, Temperature="-65°C to +150°C", Temperature Range Low=-65°C, Automotive=No, Category=Diode, ComponentLink2Description=Datasheet, ComponentLink2URL=https://www.diodes.com/assets/Datasheets/ds18004.pdf, Device Class L1="Discrete Semiconductors", Device Class L2=Diodes, Device Class L3="Zener Diodes", Digikey Description="DIODE ZENER 18V 500MW SOD123", Footprint Url=https://www.diodes.com/assets/Package-Files/SOD123.pdf, Height=1.45mm, Lead Free=Yes, Mouser Description="BZT52C18 Series 500 mW 18 V 10 mA Surface Mount Zener Diode - SOD-123", Nom Zener Voltage=18V, Octopart=https://octopart.com/bzt52c18-7-f-diodes+inc.-326572, RoHS=TRUE, Standoff Height=0mm, Temperature Range High=+150°C, Zener Impedance=45Ω
D5: library part CMP-0548-00214-2, "Transient Voltage Suppressor, 6.40 to 231 V, 48 V Stand-off Voltage, Bi-Directional, -55 to 155 degC, 2-pin DO-214AC, Pb-Free, Tape and Reel", Manufacturer="Vishay Semiconductor", Operating Junction and Storage Temperature Range="-55 to 150 degC", ComponentLink1Description="Manufacturer URL", ComponentLink1URL=http://www.vishay.com/, ComponentLink2Description=Datasheet, ComponentLink2URL=http://www.vishay.com/docs/88390/smaj50a.pdf, ComponentLink3Description="Package Specification", ComponentLink3URL=http://www.vishay.com/docs/88390/smaj50a.pdf, DatasheetVersion=12/8/2013, ID (uA)=2, IFSM="40 A", Mounting Technology="Surface Mount", PackageDescription="2-Pin DO-214AC (SMA), Body 4.245 x 2.665 mm", PackageReference=DO-214AC-2, Packing="Tape and Reel", PartNumber=SMAJ48CA-E3/61, PPPM (W)="400, 300", RoHS=TRUE, VBR Bi-Directional (V)="6.4 to 231", VWM (V)=48
D6: library part CMP-2000-05098-2, "Schottky Barrier Rectifier, 5 A, 60 V, -55 to 125 degC, 2-Pin SMD, RoHS, Tape and Reel", If - Forward Current=5A, Ifsm - Forward Surge Current=100A, Ir - Reverse Current=500uA, Manufacturer=DiodesIncorporated, Maximum Operating Temperature=+125C, Minimum Operating Temperature=-55C, Operating Temperature Range=-55Cto+125C, Package / Case=SMC, Vf - Forward Voltage=0.7V, Vrrm - Repetitive Reverse Voltage=60V, Brand=DiodesIncorporated, Configuration=Single, Datasheet URL=https://datasheet.ciiva.com/27052/1538961-27052355.pdf, Datasheet Version="Rev. 7-2, 06/2007", Factory Pack Quantity=3000, Height=2.5mm, Length=7.11mm, Manufacturer URL=http://www.diodes.com/, Mounting Style=SMD/SMT, Packaging=Reel, Product=SchottkyDiodes, Product Category=SchottkyDiodes&Rectifiers, RoHS=True, Series=B560, Technology=Si, Termination Style=SMD/SMT, Type=SchottkyBarrierRectifier, Unit Weight=0.007408oz, Width=6.22mm
D7: library part CMP-0548-00180-2, "Transient Voltage Suppressor, 6.40 to 231 V, 18 V Stand-off Voltage, Bi-Directional, -55 to 155 degC, 2-pin DO-214AC, Pb-Free, Tape and Reel", Manufacturer="Vishay Semiconductor", Operating Junction and Storage Temperature Range="-55 to 150 degC", ComponentLink1Description="Manufacturer URL", ComponentLink1URL=http://www.vishay.com/, ComponentLink2Description=Datasheet, ComponentLink2URL=http://www.vishay.com/docs/88390/smaj50a.pdf, ComponentLink3Description="Package Specification", ComponentLink3URL=http://www.vishay.com/docs/88390/smaj50a.pdf, DatasheetVersion=12/8/2013, ID (uA)=2, IFSM="40 A", Mounting Technology="Surface Mount", PackageDescription="2-Pin DO-214AC (SMA), Body 4.245 x 2.665 mm", PackageReference=DO-214AC-2, Packing="Tape and Reel", PartNumber=SMAJ18CA-E3/61, PPPM (W)="400, 300", RoHS=TRUE, VBR Bi-Directional (V)="6.4 to 231", VWM (V)=18
F1 F2 F3 F4 F5: library part CMP-08605-000062-1, "FUSE BOARD MOUNT 40A 60VDC 2SMD", Fuse Interrupt Dc Current=180A, Manufacturer="Littelfuse Inc", Manufacturer Part Number=0456040.DR, Max Fuse Dc Voltage=72V, Package=0, Resistance=1.05mΩ, Temperature="-55°C to +125°C", Temperature Range High=+125°C, Temperature Range Low=-55°C, Automotive=No, Category=Fuse, ComponentLink2Description=Datasheet, ComponentLink2URL=https://www.littelfuse.com/~/media/electronics/datasheets/fuses/littelfuse_fuse_456_datasheet.pdf.pdf, Device Class L1="Circuit Protection", Device Class L2=Fuses, Device Class L3=unset, Digikey Description="FUSE BOARD MOUNT 40A 60VDC 2SMD", Fuse Blow Speed=Fast, Fuse Current=40A, Fuse I2T=191A2Sec, Height=4.445mm, Lead Free=Yes, Mouser Description="Surface Mount Fuses 125V V/FA NANO2 40A", Octopart=https://octopart.com/0456040.dr-littelfuse-18189767, RoHS=TRUE, Voltage Rating=72V
J1 J2 J3 J4 J5: "Socket, DC supply, male, PIN: 2", Package=Package, Availability="Not in stock", Check_prices=https://www.snapeda.com/parts/XT60PW-M/AMASS/view-part/?ref=eda, MF=AMASS, MP=XT60PW-M, Price=None, SnapEDA_Link=https://www.snapeda.com/parts/XT60PW-M/AMASS/view-part/?ref=snap
J6 J7: library part CMP-002-00080-1
JP1 JP2 JP3 JP4 JP5 JP6: library part CMP-011-00014-1, "3Pin Jumper Pad SWH"
L1: library part SMPI06050-220M, "INDUCTOR POWER 22UH 7.7X6.6MM SMD"
P1: library part CMP-1755-00006-1, "Male Header, Pitch 2.5 mm, 1 x 3 Position, Height 6.1 mm, Tail Length 3.4 mm, -25 to 85 degC, RoHS, Bulk", Case\Package=DIP, Frequency="1.8 MHz", Max Operating Temperature="70 degC", Max Ouput Current="-10 mA", Max Power Dissipation="1 W", Max Supply Voltage="15 V", Min Operating Temperature="0 degC", Min Supply Voltage="1 V", Nominal Supply Current="170 uA", Package Quantity=50, Channels=1, ComponentLink1Description="Manufacturer URL", ComponentLink1URL=http://www.jst.com/home2.html, ComponentLink2Description=Datasheet, ComponentLink2URL=http://www.jst-mfg.com/product/pdf/eng/eXH.pdf, DatasheetVersion=May-16, Height="4.57 mm", Length="9.81 mm", Mount="Through Hole", PackageDescription="Male Header, Pitch 2.5 mm, 1 x 3 Position, Height 6.1 mm, Tail Length 3.4 mm", PackageReference=S3B-XH-A(LF)(SN), Packaging=Rail/Tube, Pins=8, Radiation Hardening=No, REACH SVHC="No SVHC", RoHSCompliant=true, Weight="0.015535 oz", Width="6.35 mm"
P2: library part CMP-2000-06373-1, "Male Header, Pitch 1.27 mm, 1 x 4 Position, Height 4 mm, Tail Length 2.3 mm, -40 to 105 degC, RoHS, Bulk", Manufacturer=Sullins, Package Description="Male Header, Pitch 1.27 mm, 1 x 4 Position, Height 4 mm, Tail Length 2.3 mm", Standard Package=1, Catalog Drawings=S9014ESeriesTop, Category=Connectors,Interconnects, Connector Type=Header,Unshrouded, Contact Finish=Gold, Contact Finish Thickness=Flash, Contact Mating Length="0.118\"(3.00mm)", Contact Type=MalePin, Datasheet URL=http://www.sullinscorp.com/drawings/71_GRPB___1VWVN-RC,_10957-C.pdf, Datasheet Version="Rev. C, 12/2008", Dynamic Catalog=GRPB, Family=RectangularConnectors-Headers,MalePins, Manufacturer URL=http://www.sullinscorp.com/, Mating Products="S9010E-04-ND / -CONNHEADER.050\"4POSR/APCB / S9008E-04-ND / -CONNHEADER.050\"4POSPCBGOLD / S9005E-04-ND / -CONNHEADER.050\"4POSSMDGOLD", Mounting Technology=ThroughHole, Mounting Type=ThroughHole, Number of Positions=4, Number of Positions Loaded=All, Number of Rows=1, Other Names=S9014E-04, Package Reference=GRPB041VWVN-RC, Packaging=Bulk, Pitch="0.050\"(1.27mm)", Termination=Solder
Q1 Q2 Q3 Q4: library part CMP-07173-000101-1, "MOSFET N-CH 50V 220MA SOT-23", Case/Package=SOT-23, Continuous Drain Current (ID)=220mA, Drain To Source Breakdown Voltage=50V, Drain To Source Resistance=3.5R, Gate to Source Voltage (Vgs)=20V, Input Capacitance=27pF, Max Operating Temperature=150°C, Max Power Dissipation=360mW, Min Operating Temperature=-55°C, On-State Resistance=6R, Package Quantity=1, Threshold Voltage=1.3V, Contact Plating=Tin, Current Rating=220mA, Drain to Source Voltage (Vdss)=50V, Dual Supply Voltage=50V, Element Configuration=Single, Fall Time=9ns, Height=0.93mm, Lead Free="Lead Free", Length=2.92mm, Mount="Surface Mount", Nominal Vgs=1.3V, Number of Elements=1, Number of Pins=3, Packaging="Tape and Reel", Power Dissipation=360mW, Radiation Hardening=No, Rds On Max=3.5R, REACH SVHC="No SVHC", Rise Time=9ns, Termination=SMD/SMT, Turn-Off Delay Time=20ns, Turn-On Delay Time=2.5ns, Voltage Rating (DC)=50V, Weight=0.03g, Width=1.3mm
Q5 Q6: library part CMP-12198-000042-1, "MOSFET N-CH 60V 90A POWERFLAT", Continuous Drain Current (ID)=90A, Drain to Source Voltage (Vdss)=60V, Input Capacitance=1.6nF, Max Power Dissipation=94W, Lead Free="Lead Free", Mount="Surface Mount", Number of Pins=8, Packaging="Cut Tape", Rds On Max=5.4mR, Series="STripFET™ F7"
Q7: library part CMP-013-00021-2, "N-Channel Logic Level Enhancement Mode Field Effect Transistor, 220 mA, 50 V, -55 to 150 degC, 3-Pin SOT-23, RoHS, Tape and Reel", Case/Package=TO-236-3, Input Capacitance=27pF, Manufacturer=Fairchild, Max Operating Temperature=150°C, Min Operating Temperature=-55°C, Nominal Dual Supply Voltage=50V, Package Description="3-Pin Small Outline Transistor, Body 2.92 x 1.325 mm, Pitch 0.95 mm", Package Quantity=1, Package Reference=SOT23-3, Package Version="Rev. 12, 03/2016", Power=360mW, Resistance=0.7Ohm, Datasheet URL=https://www.fairchildsemi.com/datasheets/BS/BSS138.pdf, Datasheet Version="Rev. C, 10/2005", Elements=1, Mounting Technology=SM, Nominal Vgs=1.3V, Packaging=TapeandReel, Pins=3, Rds On Max=3.5Ohm, RoHS Compliant=True, Typical Rise Time=9ns
R1 R2 R3 R4 R5 R6 R7 R8: library part CMP-2000-00704-2, "RES SMD 10K OHM 5% 1/10W 0603", Case Code (Imperial)=0603, Case Code (Metric)=1608, Max Operating Temperature=155°C, Max Power Dissipation=100mW, Min Operating Temperature=-55°C, Package Quantity=1, Resistance=10kR, Resistance Tolerance=5%, Resistor Type="Thick Film", Temperature Coefficient=200ppm/°C, Voltage Rating=75V, Voltage Rating (DC)=50V, Case/Package=0603, Construction=Rectangular, Contact Plating=Tin, Depth=0.8mm, Features="Automotive AEC-Q200", Height=0.45mm, Lead Free="Lead Free", Length=1.6mm, Military Standard=Not, Mount="Surface Mount", Number of Terminations=2, Packaging="Tape and Reel", Power Rating=100mW, REACH SVHC="No SVHC", RoHS Compliant=Yes, Series=ERJ, Technology="THICK FILM", Termination=SMD/SMT, Tolerance=5%, Weight=7.1E-05oz, Width=0.8mm, Working Voltage=75V
R9 R11 R12 R14 R16 R18 R20 R22 R23 R25 R27: library part CMP-009-00014-4, "Chip Resistor, 1 KOhm, +/-1%, 0.1 W, -55 to 155 degC, 0603 (1608 Metric)", Case/Package=0603, Max Operating Temperature=155°C, Min Operating Temperature=-55°C, Power=100mW, Tolerance=1%, Voltage Rating=50V, Mounting Technology=SM, Pins=2, RoHS Compliant=True
R10 R13: library part CMP-2000-03662-1, Manufacturer="Vishay Dale", Part Number=NTHS0603N01N1003JE
R15 R28 R29: library part CMP-2000-04238-1, Manufacturer=Yageo, Part Number=RC0603JR-070RA
R17 R19 R21 R24 R26: library part CMP-2000-05271-3, "NTC Thermistor for Temperature Sensor, 0603, 10kΩ, 1%, 0.1mA, 5V", Case Code (Imperial)=0603, Case Code (Metric)=1608, Current Rating=310uA, Manufacturer Series=NCP18, Max Operating Temperature=125°C, Max Power Dissipation=100mW, Min Operating Temperature=-40°C, Package Quantity=1, Package Shape=Rectangular, Resistance=10kR, Resistance Tolerance=1%, Accuracy=0.7%, Case/Package=0603, Depth=0.8mm, Height=0.8mm, Lead Free="Lead Free", Length=1.6mm, Mount="Surface Mount", Number of Pins=2, Number of Terminals/Pins=2, Packaging="Tape and Reel", Power Rating=100mW, Radiation Hardening=No, REACH SVHC="No SVHC", RoHS Compliant=Yes, Series=NCP, Terminal Finish=Tin, Terminal Placement=Dual, Termination=SMD/SMT, Thermistor Application="TEMPERATURE COMPENSATION", Tolerance=1%
R30 R31 R32 R33 R34 R35 R36: library part CMP-1666-00005-4, "Chip Resistor, 10 KOhm, +/- 1%, 100 mW, -55 to 155 degC, 0603 (1608 Metric), RoHS, Tape and Reel", Manufacturer="Vishay Semiconductor", Max Operating Temperature="155 degC", Min Operating Temperature="-55 degC", Package Quantity=5000, Voltage Rating="75 V", ComponentLink1Description="Manufacturer URL", ComponentLink1URL=http://www.vishay.com/, ComponentLink2Description=Datasheet, ComponentLink2URL=https://datasheet.ciiva.com/11809/0900766b80d98afc-11809037.pdf, DatasheetVersion=06/2012, Height="0.45 mm", Length="1.55 mm", Mounting Technology="Surface Mount", PackageDescription="2-Pin Surface Mount Device, Body 1.575 x 0.85 mm", PackageReference=0603, Packaging="Tape and Reel", REACH SVHC=Unknown, RoHSCompliant=true
SW1: library part CMP-2000-05087-3, "SWITCH SLIDE DPDT 300MA 6V", Actuator Color=Black, Contact Current Rating=300mA, Contact Resistance=70mR, Flammability Rating="UL94 V-2", Max Operating Temperature=85°C, Max Voltage Rating (DC)=6V, Min Operating Temperature=-20°C, Package Quantity=1, Actuator Length=2mm, Actuator Material=Nylon, Actuator Type=Standard, Contact Material="Copper Alloy", Contact Plating=Silver, Current Rating=300mA, Depth=7.5mm, Electrical Life=5000Cycles, Housing Material=Nylon, Lead Free="Lead Free", Length=9mm, Max Current Rating=300mA, Mount="Surface Mount", Orientation=Vertical, Packaging="Tape and Reel", Radiation Hardening=No, REACH SVHC="No SVHC", Series=JS, Switch Function=On-On, Switch Travel=2mm, Termination="Gull Wing", Throw Configuration=DPDT, Voltage Rating (DC)=6V
SW2: library part CMP-2000-07501-1, "FSMSM Push Button Switch, 50 mA, -35 to 85 degC, 2-Pin SMD, RoHS, Tape and Reel", Case\/Package=SMD/SMT, Contact Current Rating=50mA, Contact Resistance=100mOhm, Manufacturer="TE Connectivity", Max Operating Temperature=85degC, Max Voltage Rating (DC)=12V, Min Operating Temperature=-35degC, Operating Force=180gf, Package Description="2-Pin Surface Mount Device, Body 6 x 3.5 mm, Pitch 9.19 mm", Package Quantity=1800, Voltage Rating (DC)=24V, Actuator Length=1.07mm, Actuator Material=Polyamide, Contact Material=Brass, Contact Plating=Silver, Current Rating=50mA, Datasheet URL=http://www.te.com/commerce/DocumentDelivery/DDEController?Action=showdoc&DocId=Customer+Drawing%7F1437566-3%7FC2%7Fpdf%7FEnglish%7FENG_CD_1437566-3_C2_1437566_3_1_c.dwg.pdf%7F1437566-4, Datasheet Version="Rev. C2, 08/2014", Electrical Life=20000Cycles, ELV=Compliant, Illumination Type=Illuminated, Lead Free=LeadFree, Manufacturer URL=http://www.te.com/, Mechanical Life=20000Cycles, Mount=SurfaceMount, Mounting Technology=SurfaceMount, Orientation=Straight, Package Reference=FSMSMTR, Packaging=TapeandReel, REACH SVHC=Unknown, RoHSCompliant=true, Switch Travel=0.25mm, Termination=GullWing, Throw Configuration=SPST
U1: library part CMP-0237-00215-3, "ARM Cortex-M3 32-bit MCU, 64 KB Flash, 20 KB Internal RAM, 37 I/Os, 48-pin LQFP, -40 to 85 degC, Tray", I/Os (High Current)=37, Operating Frequency(F) (Processor speed) (MHz)=72, Supply Voltage(Vcc) min (V)=2, A/D Converter="2x12-bit (10 Channel)", ComponentLink1Description="Manufacturer URL", ComponentLink1URL=http://www.st.com/web/en/home.html, ComponentLink2Description=Datasheet, ComponentLink2URL=http://www.st.com/st-web-ui/static/active/en/resource/technical/document/datasheet/CD00161566.pdf, ComponentLink3Description="Package Specification", ComponentLink3URL=http://www.st.com/st-web-ui/static/active/en/resource/technical/document/datasheet/DM00058181.pdf, Core="ARM Cortex-M3", DatasheetVersion="Rev. 16", FLASH Size (Prog) (kB)=64, Internal RAM Size (kB)=20, Mounting Technology="Surface Mount", PackageDescription="48-Pin Low Profile Quad Flat Package, 7 x 7 mm Body, 0.5 mm Pitch", PackageReference=LQFP48, PackageVersion="Rev. 6, 06/2013", Packing=Tray, PartNumber=STM32F103C8T6
U2: library part CMP-0055-00162-3, "Operational Amplifier, 8-pin MDIP, Pb-Free", Manufacturer="Texas Instruments", Package Reference=P0008A, PackageTopMarking=NSUZXYTTE#*LM*741CN, PowerWise=N, Code_JEDEC=MS-001-BA, ComponentLink1Description="Datasheet URL", ComponentLink1URL=http://www.ti.com/general/docs/lit/getliterature.tsp?genericPartNumber=LM741&fileType=pdf, CompType=Amplifiers, PackageDescription="MDIP, .365 x .250 x .130in, 8 Lead, .100in Pitch", PinCount=8, RoHS=Y
U3: library part CMP-0244-00177-2, "IC REG LINEAR 5V 500MA DPAK", Case/Package=TO-252, Dropout Voltage=2V, Max Input Voltage=35V, Max Operating Temperature=125°C, Max Output Current=500mA, Min Input Voltage=10V, Min Operating Temperature=-40°C, Min Output Voltage=5V, Output Voltage Accuracy=2%, Package Quantity=1, Power Supply Rejection Ratio (PSRR)=62dB, Quiescent Current=6mA, Tolerance=4%, Accuracy=2%, Contact Plating=Tin, Height=2.4mm, Lead Free="Lead Free", Length=6.6mm, Mount="Surface Mount", Nominal Output Voltage=5V, Number of Outputs=1, Number of Pins=3, Number of Regulators=1, Output Current=500mA, Output Type=Fixed, Output Voltage=5V, Packaging="Tape and Reel", Polarity=Positive, Radiation Hardening=No, REACH SVHC="No SVHC", Weight=0.01lb, Width=6.2mm
U4: library part CMP-04917-000053-1, "IC REG LINEAR 3.3V 300MA SOT23-5", Dropout Voltage=125mV, Manufacturer="Texas Instruments", Max Junction Temp=+125°C, Max Supply Voltage=5.5V, Min Supply Voltage=1.4V, Nominal Supply Current=34uA, Output Current=300mA, Output Voltage=3.3V, Package=DBV0005A, Temperature="-40°C to +125°C", Temperature Range Low=-40°C, Accuracy Percentage=1%, Automotive=No, Category=IC, ComponentLink2Description=Datasheet, ComponentLink2URL=http://www.ti.com/lit/ds/symlink/tlv733p.pdf, Device Class L1="Integrated Circuits (ICs)", Device Class L2="Power Management ICs", Device Class L3="Voltage Regulators - Linear", Digikey Description="IC REG LINEAR 3.3V 300MA SOT23-5", Height=1.45mm, Lead Free=Yes, Manufacturer Part Number=TLV73333PDBVR, Mouser Description="LDO Voltage Regulators Capacitr-Free 300-mA 5-SOT-23 -40 to 125", Number of Outputs=1, Octopart=https://octopart.com/tlv73333pdbvr-texas+instruments-51080890, Output Type=Fixed, RoHS=TRUE, Standoff Height=0mm, Temperature Range High=+125°C
U5: library part CMP-82923-000167-2, "SENSOR CURRENT HALL 150A AC/DC", Case/Package=125, Current Sensing=150A, Frequency=120kHz, Max Operating Temperature=125°C, Max Supply Current=15mA, Min Operating Temperature=-40°C, Package Quantity=34, Quiescent Current=10mA, Accuracy=0.6%, Bandwidth=120kHz, Linearity=1%, Mount="Through Hole", Number Of Channels=1, Number of Pins=5, Packaging=Rail/Tube, Polarity=Bidirectional, Response Time=4.6us, RoHS Compliant=Yes, Sensitivity=13.3mV/A
U6: "No Description Available", Mfr_Name="Texas Instruments", Copyright="Copyright (C) 2023 Ultra Librarian. All rights reserved.", Manufacturer_Part_Number=TPS54560DDAR, RefDes=RefDes, Type=DEV
Y1: library part CMP-2000-05033-2, "Crystal 8MHz ±20ppm 18pF SMD-2 5mm x 3.2mm", Case/Package=CSMD, ESR (Equivalent Series Resistance)=140R, Frequency=8MHz, Frequency Stability=30ppm, Frequency Tolerance=20ppm, Load Capacitance=18pF, Max Operating Temperature=85°C, Min Operating Temperature=-40°C, Package Quantity=1000, Resistor Type=Ceramic, Series Resistance=500R, Depth=3.2mm, Height=0.051inch, Lead Free="Lead Free", Length=5mm, Mount="Surface Mount", Number of Pins=2, Packaging="Tape and Reel", Radiation Hardening=No, RoHS Compliant=Yes, Termination=SMD/SMT, Tolerance=20ppm, Width=3.2mm

## Free pads (board coordinates)
  round 4.5 hole 3: 1(3,107) 2(69,107) 3(3.048,3.048) 4(69,3)

## Via types
v1: diameter 0.8, hole 0.5, Top Layer to Bottom Layer, 32 vias

## Nets (pads, with @x,y where several pads share a name; then routed paths per layer and width w, separated by ;. In a path a pad name is that pad's centre, name@x,y a point inside that pad or via, vN(x,y) a via of type N, cw(c..) or ccw(c..) an arc to the next point about the centre after c; other vN are vias at no path point)
3.3: C3.1 C4.1 C5.1 C6.1 C7.2 C8.1 C12.1 JP1.3 JP2.3 P2.1 Q1.1 Q2.1 Q3.1 Q4.1 R1.1 R2.1 R5.1 R6.1 R15.2 R17.2 R19.2 R21.2 R24.2 R26.2 U1.9 U1.24 U1.36 U1.48 U2.7 U4.5
3V3_CURR_SENSOR: R28.1 R29.2 U1.17 U5.3
+5: C11.1 C13.1 JP1.1 JP2.1 R3.1 R4.1 R7.1 R8.1 R28.2 U3.3 U4.1 U4.3 U5.1
+17V0: C20.2 C21.2 D1.2 D3.2 D7.2 J4.1 L1.2 R32.2
+AUX_SOURCE: C16.2 C17.2 C18.2 C19.2 F5.1 R31.2 U6.2
+BAT: D4.2 F1.1 F2.1 F3.1 R12.1
+BMS: F4.1 J3.1
+UPS: C10.2 D3.1 D4.1 J1.1 P1.1 U3.1 U5.4
  other v1: -146.606,-99.537 -145.273,-99.537 -143.939,-99.537 -142.606,-99.537 -147.782,-99.155 -141.43,-99.155 -148.508,-98.156 -140.704,-98.156 -148.508,-96.919 -140.704,-96.92 -147.782,-95.92 -141.43,-95.92 -146.606,-95.538 -145.273,-95.538 -143.939,-95.538 -142.606,-95.538
-EN: Q7.3 R31.1 R34.2 U6.3
-SYSTEM: J1.2 Q5.5-6-7-8 Q6.5-6-7-8 R14.1 U5.5
  other v1: -156.606,-99.537 -155.273,-99.537 -153.939,-99.537 -152.606,-99.537 -157.782,-99.155 -151.43,-99.155 -158.508,-98.156 -150.704,-98.156 -158.508,-96.92 -150.704,-96.919 -157.782,-95.92 -151.43,-95.92 -156.606,-95.538 -155.273,-95.538 -153.939,-95.538 -152.606,-95.538
ADC_BAT: R9.2 U1.16 U2.6
ADC_NTC1: R19.1 R20.1 U1.11
ADC_NTC2: R26.1 R27.1 U1.12
ADC_NTC3: R17.1 R18.1 U1.13
ADC_NTC4: R24.1 R25.1 U1.14
ADC_NTC5: R21.1 R23.1 U1.15
BOOT0: R10.1 R13.1 U1.44
BUCK_EN: Q7.1 R30.2 U1.21
FB: R32.1 R35.2 U6.5